# EAGLE board RCM-PBB_E1 (EAGLE 7.6.0)
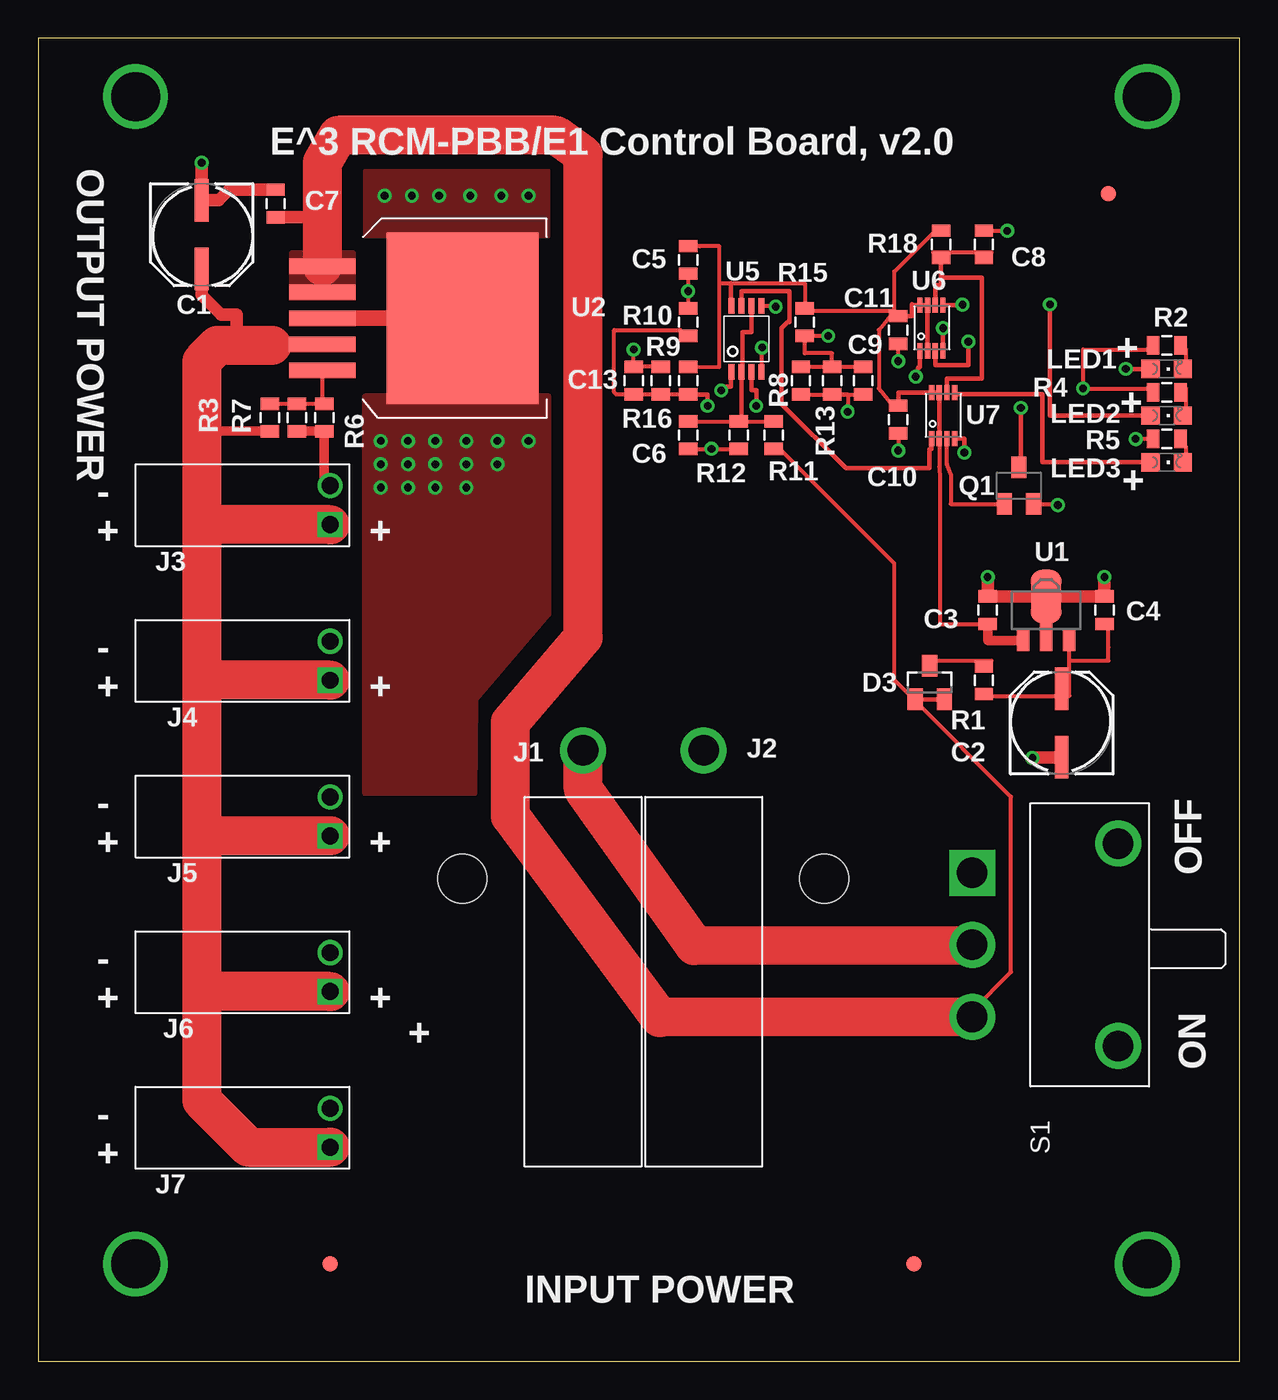
[diagram p0: board, top side]
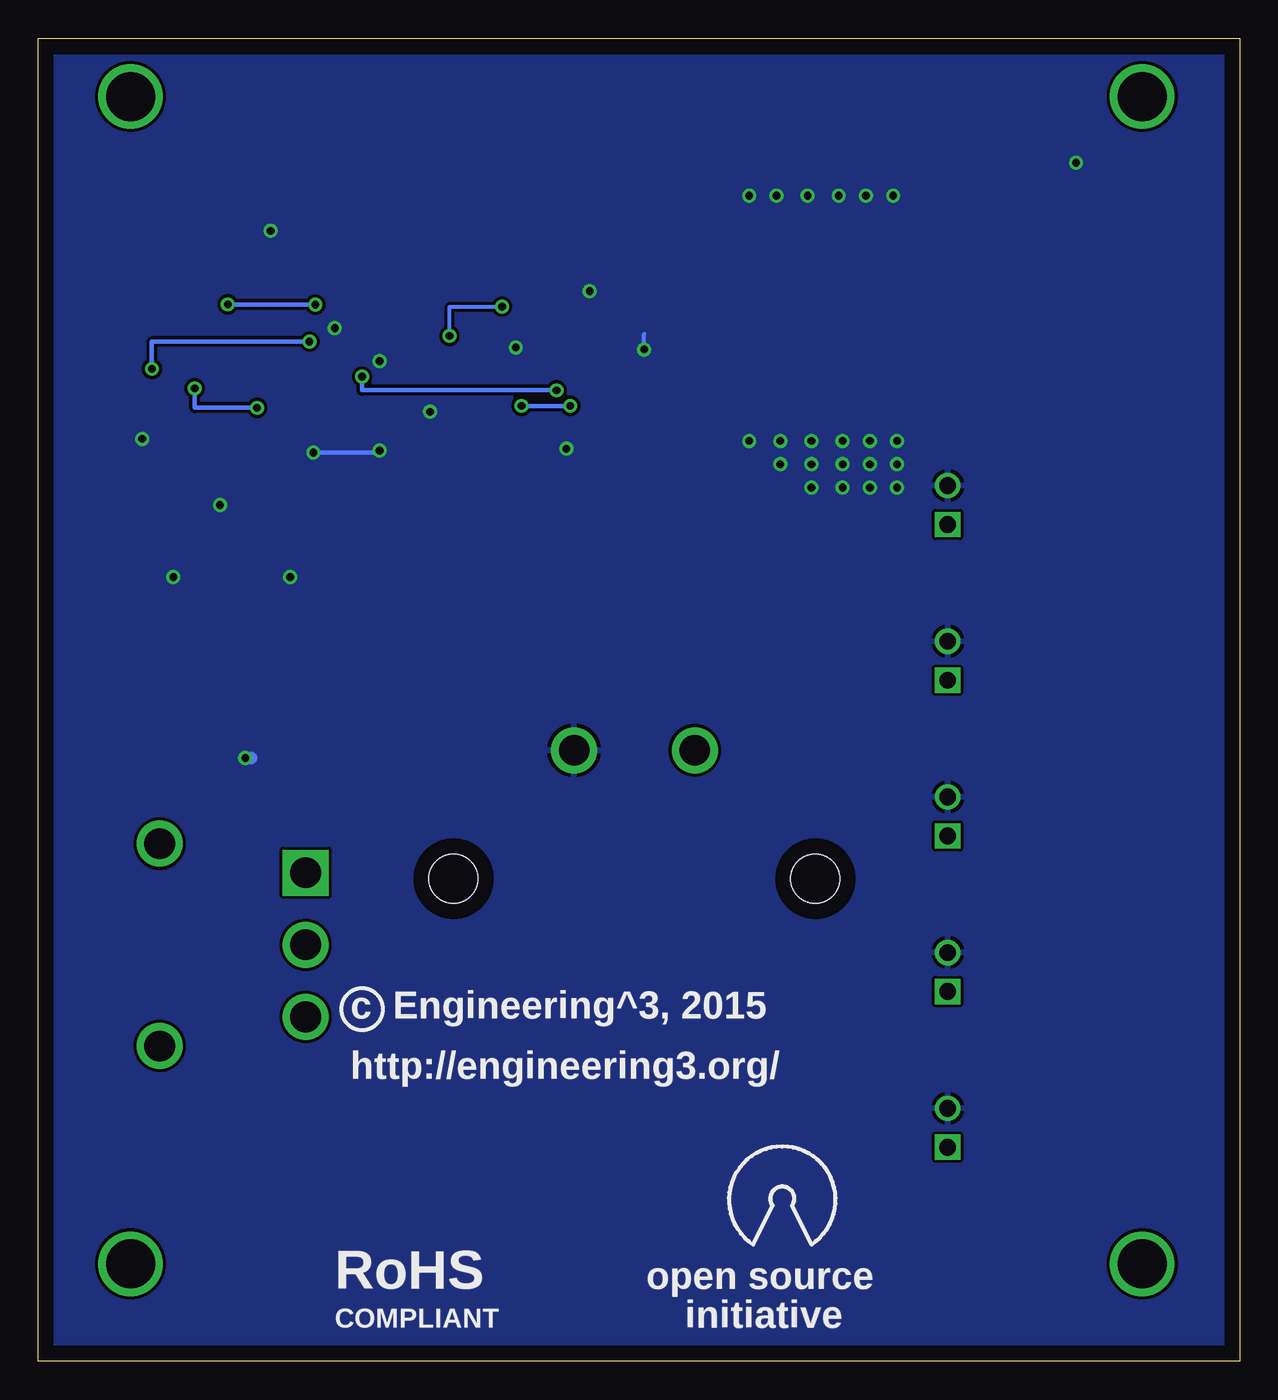
[diagram p1: board, bottom side, seen from below]

Size 78.41 x 86.35 mm. Coordinates in mm from the lower left corner, seen from the top.
Outline: 0,0 78.41,0 78.41,86.35 0,86.35 0,0
Copper layers (1*16): Top 0.035mm / dielectric 1.5mm / Bottom 0.035mm
Design rules "default": minimum track width 10mil, minimum drill 24mil, track to track 8mil, track to pad 12mil, pad to pad 12mil, via to via 8mil, smd to smd 8mil, copper to edge 40mil, drill to drill 8mil, minimum pad ring 10mil, minimum via ring 8mil, stop-mask expansion 4mil, vias tented up to drill 0mil, thermal gap 10mil
Holes 3.2 mm at 51.31,31.5 27.69,31.5

## Footprints (pad centres in the part's own frame; a part is rotated, then mirrored left to right if it is on the bottom)
PANASONIC-D8-ELT-CAP = smd 2.784 x 0.892: + 2.238,0; - -2.238,0
0805 = smd 0.8 x 1.2: 1 -0.9,0; 2 0.9,0
SOT23 = smd 1 x 1.4: 1 -0.95,-1.1; 2 0.95,-1.1; 3 0,1.1
ANDERSON_POWER_POLE = drill 2: P1 -1.778,0
HEADER_1X2_SHROUDED = drill 1.1 square: 1 0,-1.27 | drill 1.1: 2 0,1.27
FIDUCIAL-1X2.5 = smd 1 x 1: 1 0,0
CHIPLED_0805 = smd 1.2 x 1.2: A 0,-1.05; C 0,1.05
SC59-BEC = smd 1 x 1.4: B -0.95,-1.2; C 0,1.2; E 0.95,-1.2
SWITCH_SLIDE_RA = drill 2 square: 1 -4.699,0 | drill 2: 2 0,0; 3 4.699,0; NC1 -6.604,9.525; NC2 6.604,9.525
SOT89 = smd 0.8 x 1.4: 1 -1.499,-1.981; 3 1.499,-1.981 | smd 0.8 x 1.9: 2 0,-1.727 | smd 2 x 3.5: 2.1 0,0.889
TO263-5 = smd 1.02 x 4.32: 1 -3.4,-9.145; 2 -1.7,-9.145; 3 0,-9.145; 4 1.7,-9.145; 5 3.4,-9.145 | smd 11.18 x 9.91: TAB 0,0
MSOP8NOPAD = smd 0.4 x 1: 1 -0.975,-1.972; 2 -0.325,-1.972; 3 0.325,-1.972; 4 0.975,-1.972; 5 0.975,2.328; 6 0.325,2.328; 7 -0.325,2.328; 8 -0.975,2.328
VSSOP08 = smd 0.356 x 1: 1 -1,-1.5; 2 -0.5,-1.5; 3 0,-1.5; 4 0.5,-1.5; 5 0.5,1.5; 6 0,1.5; 7 -0.5,1.5; 8 -1,1.5

## Placement (x,y rotation side)
C1  CAP_ELT_PANASONIC_100UF  [PANASONIC-D8-ELT-CAP]  10.67,73.53 270 top
C2  CAP_ELT_PANASONIC_100UF  [PANASONIC-D8-ELT-CAP]  66.8,41.66 90 top
C3  0.1u  [0805]  61.98,49.02 90 top
C4  0.47u  [0805]  69.6,49.02 90 top
C5  0.1u  [0805]  42.42,71.88 270 top
C6  0.1u  [0805]  42.42,60.45 270 top
C7  0.47u  [0805]  15.49,75.56 90 top
C8  0.47u  [0805]  61.72,72.9 90 top
C9  0.1u  [0805]  53.85,64.01 270 top
C10  0.1u  [0805]  56.13,61.47 270 top
C11  0.1u  [0805]  56.13,67.31 270 top
C13  0.1u  [0805]  38.86,64.01 90 top
D3  BAS40-05  [SOT23]  58.19,44.3 0 top
J1  ANDERSON_POWER_POLE  [ANDERSON_POWER_POLE]  35.56,38.1 270 top
J2  ANDERSON_POWER_POLE  [ANDERSON_POWER_POLE]  43.43,38.1 270 top
J3  CON1X2_SHROUDED  [HEADER_1X2_SHROUDED]  19.05,55.88 0 top
J4  CON1X2_SHROUDED  [HEADER_1X2_SHROUDED]  19.05,45.72 0 top
J5  CON1X2_SHROUDED  [HEADER_1X2_SHROUDED]  19.05,35.56 0 top
J6  CON1X2_SHROUDED  [HEADER_1X2_SHROUDED]  19.05,25.4 0 top
J7  CON1X2_SHROUDED  [HEADER_1X2_SHROUDED]  19.05,15.24 0 top
JP4  FIDUCIAL1X2.5  [FIDUCIAL-1X2.5]  57.15,6.35 0 top
JP5  FIDUCIAL1X2.5  [FIDUCIAL-1X2.5]  19.05,6.35 0 top
JP6  FIDUCIAL1X2.5  [FIDUCIAL-1X2.5]  69.85,76.2 0 top
LED1  [CHIPLED_0805]  73.66,64.77 270 top
LED2  [CHIPLED_0805]  73.66,61.72 270 top
LED3  [CHIPLED_0805]  73.66,58.67 270 top
Q1  MUN2211T1  [SC59-BEC]  64.01,57.15 0 top
R1  100  [0805]  61.72,44.45 90 top
R2  1k  [0805]  73.66,66.29 0 top
R3  750  [0805]  15.11,61.59 270 top
R4  1k  [0805]  73.66,63.25 0 top
R5  1k  [0805]  73.66,60.2 0 top
R6  240  [0805]  18.67,61.59 90 top
R7  240  [0805]  16.89,61.59 90 top
R8  715k  [0805]  49.78,64.01 90 top
R9  619k  [0805]  40.64,64.01 270 top
R10  10.5k  [0805]  42.42,67.82 270 top
R11  49.9k  [0805]  48.01,60.45 270 top
R12  19.1k  [0805]  45.72,60.45 90 top
R13  9.31k  [0805]  51.82,64.01 90 top
R15  10k  [0805]  50.04,67.82 90 top
R16  10k  [0805]  42.42,64.01 90 top
R18  1M  [0805]  58.93,72.9 270 top
S1  SWITCH_SLIDE_ON_ON  [SWITCH_SLIDE_RA]  60.96,27.18 270 top
U1  MC78L05ACHX  [SOT89]  65.79,49.02 0 top
U2  MIC29502WU  [TO263-5]  27.69,68.07 270 top
U5  MCP6542E/MS  [MSOP8NOPAD]  46.23,66.55 0 top
U6  74LVC1G74VSSOP08  [VSSOP08]  58.55,67.44 0 top
U7  74LVC1G74VSSOP08  [VSSOP08]  59.31,61.72 0 top

## Library data of the parts
C1 C2 J1-J7 S1 U1 U5-U7 = JLY Parts
C3-C11 C13 R1-R13 R15 R16 R18 = SparkFun
D3 = diode
JP4-JP6 = SparkFun-Aesthetics
LED1-LED3 = led
Q1 = transistor-npn
U2 = JLY_Parts

## Nets
5V: C3.1 C5.1 C10.1 C11.1 R15.2 R16.2 R18.1 U1.1 U5.8 U6.2 U6.7 U6.8 U7.2 U7.7 U7.8
BATT+: C7.1 D3.1 D3.2 R11.2 S1.3 U2.1 U2.2
GND: C1.- C2.- C3.2 C4.2 C5.2 C6.2 C7.2 C8.2 C9.2 C10.2 C11.2 C13.2 J2.P1 J3.2 J4.2 J5.2 J6.2 J7.2 Q1.E R5.1 R6.1 R7.1 R8.1 R9.1 R10.1 R12.1 R13.1 U1.2 U2.3 U2.TAB U5.4 U6.4 U7.4
N$1: D3.3 R1.2
N$2: C13.1 R9.2 R10.2 R16.1 U5.3
N$4: LED1.C R2.2
N$5: U5.1 U6.1
N$6: C8.1 R18.2 U6.6 U7.6
N$7: U5.7 U7.1
N$8: Q1.C R2.1 R4.1
N$9: C1.+ J3.1 J4.1 J5.1 J6.1 J7.1 R3.2 U2.4
N$10: LED3.A U7.5
N$11: J1.P1 S1.2
N$12: LED1.A U6.3
N$14: C9.1 R8.2 R13.2 R15.1 U5.5
N$15: LED3.C R5.2
N$18: C6.1 R11.1 R12.2 U5.2 U5.6
N$20: C2.+ C4.1 R1.1 U1.3
N$21: LED2.C R4.2
N$22: LED2.A U6.5
N$23: Q1.B U7.3
N$25: R3.1 R6.2 R7.2 U2.5

## Tracks (layer width: path | path; a pad name or v marks a point on that pad's centre or on a via)
5V
  Top 0.254: 44.45,70.36 45.21,70.36 50.04,70.36 R15.2 50.04,68.58 55.88,68.58 | R16.2 44.45,64.9 44.45,70.36 | 44.45,70.36 44.45,72.77 43.18,72.77 C5.1 | 55.88,68.58 54.86,67.31 54.86,63.5 55.88,62.23 C10.1 | 55.88,68.58 55.88,71.12 58.42,73.66 R18.1 | C3.1 62.23,48.26 | 55.88,68.58 C11.1 | 61.98,48.13 58.85,48.13 58.85,57.61 58.81,58.37 U7.2
  Top 0.305: 61.98,48.13 C3.1 | 57.02,68.94 57.02,68.2 56.13,68.2 C11.1 | U5.8 45.21,68.88 45.21,70.36 | U7.2 U7.7 U7.8 56.13,63.22 C10.1 | 57.02,68.94 U6.8 U6.7 U6.2 | 57.02,68.94 57.02,68.98
  Top 0.61: U1.1 61.98,47.04 C3.1
BATT+
  Top 0.254: 57.15,43.18 55.88,44.45 55.88,52.07 48.26,59.69 R11.2 | 57.15,43.18 63.5,36.83 63.5,25.4 60.96,22.86 S1.3 | 57.15,43.18 D3.1
  Top 0.305: D3.1 D3.2
  Top 0.61: 18.54,69.6 U2.2 U2.1
  Top 0.813: C7.1 18.53,74.67 18.54,74.68
  Top 2.54: S1.3 40.56,22.43 30.81,35.59 30.81,41.71 35.56,47.24 35.56,78.74 33.78,80.01 19.56,80.01 18.54,78.23 18.54,74.68 U2.1
  pour Top (no thermals): 16.51,72.39 20.57,72.39 20.57,71.88 20.57,69.34 16.51,69.34
GND  (via drill 0.5)
  Top 0.254: v38.86,66.04 C13.2 R9.1 | R10.1 v42.42,69.85 C5.2 42.42,70.74 | C6.2 v43.94,59.55 | v43.94,59.55 R12.1 | v43.94,59.55 v43.94,59.56 | U5.4 47.24,64.58 v47.24,66.17 | R13.1 52.83,63.11 | 52.83,63.11 51.31,63.12 51.3,63.11 R8.1 | 52.83,63.11 v52.83,61.98 | 52.83,63.11 C9.2 | C10.2 v56.13,59.44 | v56.13,65.28 C11.2 | C8.2 v63.25,73.8 v63.25,73.79 | Q1.E 66.55,55.95 v66.55,55.88 | R5.1 v71.63,60.2 | 65.79,49.92 U1.2
  Top 0.305: U7.4 60.45,60.22 v60.45,59.31 | U6.4 v59.05,67.44
  Top 0.61: J3.2 18.67,57.53 R6.1 R7.1
  Top 0.813: C4.2 v69.6,51.18 | v61.98,51.18 C3.2 65.79,49.92 C4.2 | C4.2 | C2.- 64.9,39.42 v64.9,39.37 | v10.67,78.23 C1.- 11.76,75.77 12.45,76.45 15.48,76.45 C7.2
  Top 1.016: U2.3 U2.TAB
  Bottom 0.254: v38.86,66.04 38.86,67.06 | v43.94,59.56 44.2,59.56 | v47.24,66.17 47.24,66.04 | v56.13,59.44 56.13,59.18 | v56.13,65.28 56.13,65.15 | v66.55,55.88 66.8,55.88 66.8,56.01 | v71.63,60.2 71.37,60.2 | v69.6,51.18 69.6,51.44 | v61.98,51.18 61.98,51.44 | v63.25,73.79 63.25,73.66
  Bottom 0.305: v60.45,59.31 56.13,59.31 v56.13,59.44 | v59.05,67.44 59.31,67.44 59.31,67.56
  Bottom 0.813: v64.9,39.37 64.52,39.37
  other vias: 32,60.07 22.61,76.07 24.38,76.07 30.23,76.07 32,76.07 26.16,76.07 28.19,76.07 22.35,60.07 24.13,60.07 29.97,60.07 25.91,60.07 27.94,60.07 29.97,58.55 27.94,58.55 25.91,58.55 24.13,58.55 22.35,58.55 22.35,57.02 24.13,57.02 25.91,57.02 27.94,57.02
  pour Bottom: 0.51,0.51 77.72,0.51 77.72,85.6 0.51,85.6
  pour Top (no thermals): 21.34,77.72 33.27,77.72 33.27,73.41 21.34,73.41
  pour Top (no thermals): 21.34,62.99 33.27,62.99 33.27,48.77 28.5,43.21 28.45,37.08 21.34,37.08
N$1
  Top 0.254: R1.2 62.23,45.72 58.42,45.72 D3.3
N$2  (via drill 0.5)
  Top 0.254: R10.2 41.91,67.31 37.59,67.31 37.59,63.25 37.73,63.11 C13.1 R9.2 R16.1
  Top 0.305: R16.1 43.69,63.11 v43.69,62.36 | v46.86,62.36 46.86,63.37 46.55,63.37 U5.3
  Bottom 0.305: v43.69,62.36 v46.86,62.36
N$3  (via drill 3.2)
  other vias: 6.35,82.55
N$4
  Top 0.254: R2.2 74.93,66.04 74.93,64.77 LED1.C
N$5  (via drill 0.5)
  Top 0.305: U5.1 45.21,64.58 45.21,63.63 44.58,63.63 v44.58,63.37 | v57.28,64.26 57.45,64.9 57.55,64.9 U6.1
  Bottom 0.305: v44.58,63.37 57.28,63.37 v57.28,64.26
N$6
  Top 0.254: R18.2 58.42,72.39 62.23,72.39 C8.1
  Top 0.305: 58.93,70.74 61.59,70.74 61.59,64.14 59.31,64.14 U7.6 | 58.93,70.74 R18.2 | U6.6 58.55,70.23 58.93,70.23 58.93,70.74
N$7
  Top 0.305: U5.7 45.9,69.85 49.02,69.85 49.02,67.82 48.9,67.82 48.51,67.44 48.51,62.48 52.7,58.29 58.17,58.29 58.17,59.54 58.31,59.54 U7.1
N$8  (via drill 0.5)
  Top 0.254: R4.1 72.39,63.5 v68.2,63.5 68.2,66.04 72.39,66.04 R2.1
  Top 0.305: Q1.C 64.14,58.35 v64.14,62.23
  Bottom 0.305: v64.14,62.23 68.2,62.23 v68.2,63.5
N$9
  Top 0.61: R3.2 10.68,60.7 10.67,60.71
  Top 0.813: U2.4 15.32,66.37 15.24,66.29 | C1.+ 10.67,69.6 11.94,68.33 12.95,68.33 12.95,66.29
  Top 2.54: 15.24,66.29 12.95,66.29 11.68,66.29 10.67,65.28 10.67,60.71 10.67,54.61 | 10.67,54.61 10.67,44.45 | 10.67,44.45 10.67,34.54 | 10.67,34.54 10.67,24.13 | 10.67,24.13 10.67,17.02 13.72,13.97 J7.1 | J6.1 10.67,24.13 | J5.1 10.92,34.29 10.67,34.54 | J4.1 10.67,44.45 | J3.1 10.67,54.61
N$10
  Top 0.305: LED3.A 65.53,58.67 65.53,63.14 59.81,63.14 U7.5
N$11
  Top 2.54: J1.P1 35.56,37.36 42.82,27.13 S1.2
N$12  (via drill 0.5)
  Top 0.305: v70.99,64.77 LED1.A | v60.71,66.55 60.71,65.02 58.55,65.02 U6.3
  Bottom 0.305: v60.71,66.55 70.99,66.55 v70.99,64.77
N$14  (via drill 0.5)
  Top 0.254: U5.5 48.01,68.88 v48.13,68.83 | v51.56,66.93 R15.1 50.04,65.79 51.82,65.79 R13.2 | R13.2 C9.1 | R8.2 R13.2
  Bottom 0.254: v48.13,68.83 51.56,68.83 v51.56,66.93
N$15
  Top 0.254: R5.2 74.93,59.69 74.93,58.42 LED3.C
N$16  (via drill 3.2)
  other vias: 72.39,82.55
N$17  (via drill 3.2)
  other vias: 72.39,6.35
N$18
  Top 0.254: R12.2 C6.1 | R12.2 R11.1 | R12.2
  Top 0.305: R12.2 45.9,61.35 U5.2 45.97,64.58 45.97,67.18 46.55,67.18 U5.6
N$19  (via drill 3.2)
  other vias: 6.35,6.35
N$20
  Top 0.254: 67.31,45.72 67.31,46.99 U1.3 | 67.31,45.72 67.31,43.43 66.8,43.43 62.23,43.43 R1.1 | 67.31,45.72 69.85,45.72 69.85,46.61 69.85,48.26 C4.1
  Top 0.305: 66.8,43.43 C2.+
N$21
  Top 0.254: R4.2 74.93,63.5 74.93,62.23 LED2.C
N$22  (via drill 0.5)
  Top 0.305: LED2.A 66.04,61.72 v66.04,68.98 | U6.5 60.33,68.94 v60.33,68.96
  Bottom 0.305: v60.33,68.96 65.53,68.96 v66.04,68.98
N$23
  Top 0.254: Q1.B 59.56,55.95 59.56,57.91 59.31,58.55 U7.3
N$25
  Top 0.254: R3.1 R7.2 R6.2 18.54,62.62 18.54,63.5 18.54,63.76 U2.5

## Text on the board
tPlace: E^3 RCM-PBB/E1 Control Board, v2.0 | OUTPUT POWER | + | + | + | - | + | + | - | + | + | - | + | + | OFF | - | + | + | + | ON | - | + | INPUT POWER
bPlace: c Engineering^3, 2015 | http://engineering3.org/ | open source | RoHS | initiative | COMPLIANT